# Altium PCB 24.067.PcbDoc
Units mil, origin at the board's own origin, x right, y up, seen from the top; angles counter-clockwise.
Board outline 1456.69 x 866.14 mil, 2 copper layers (Top Layer, Bottom Layer); 3 components, 16 nets, 33 pads, 0 vias.
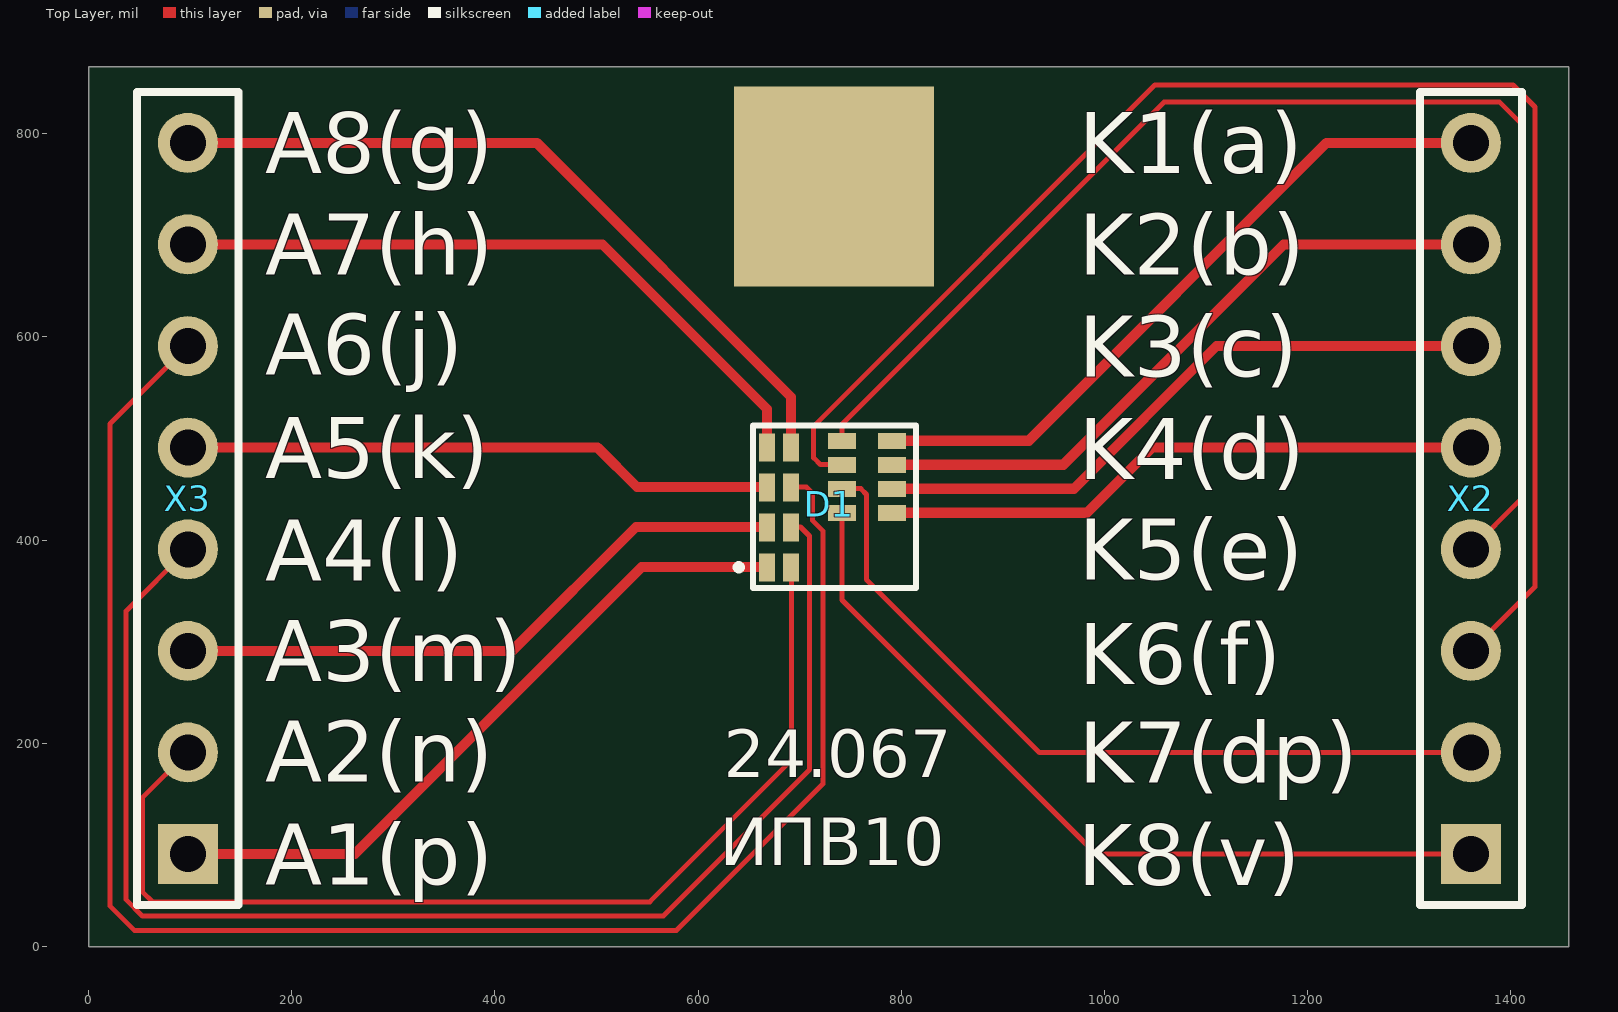
[diagram p0: Top Layer view]
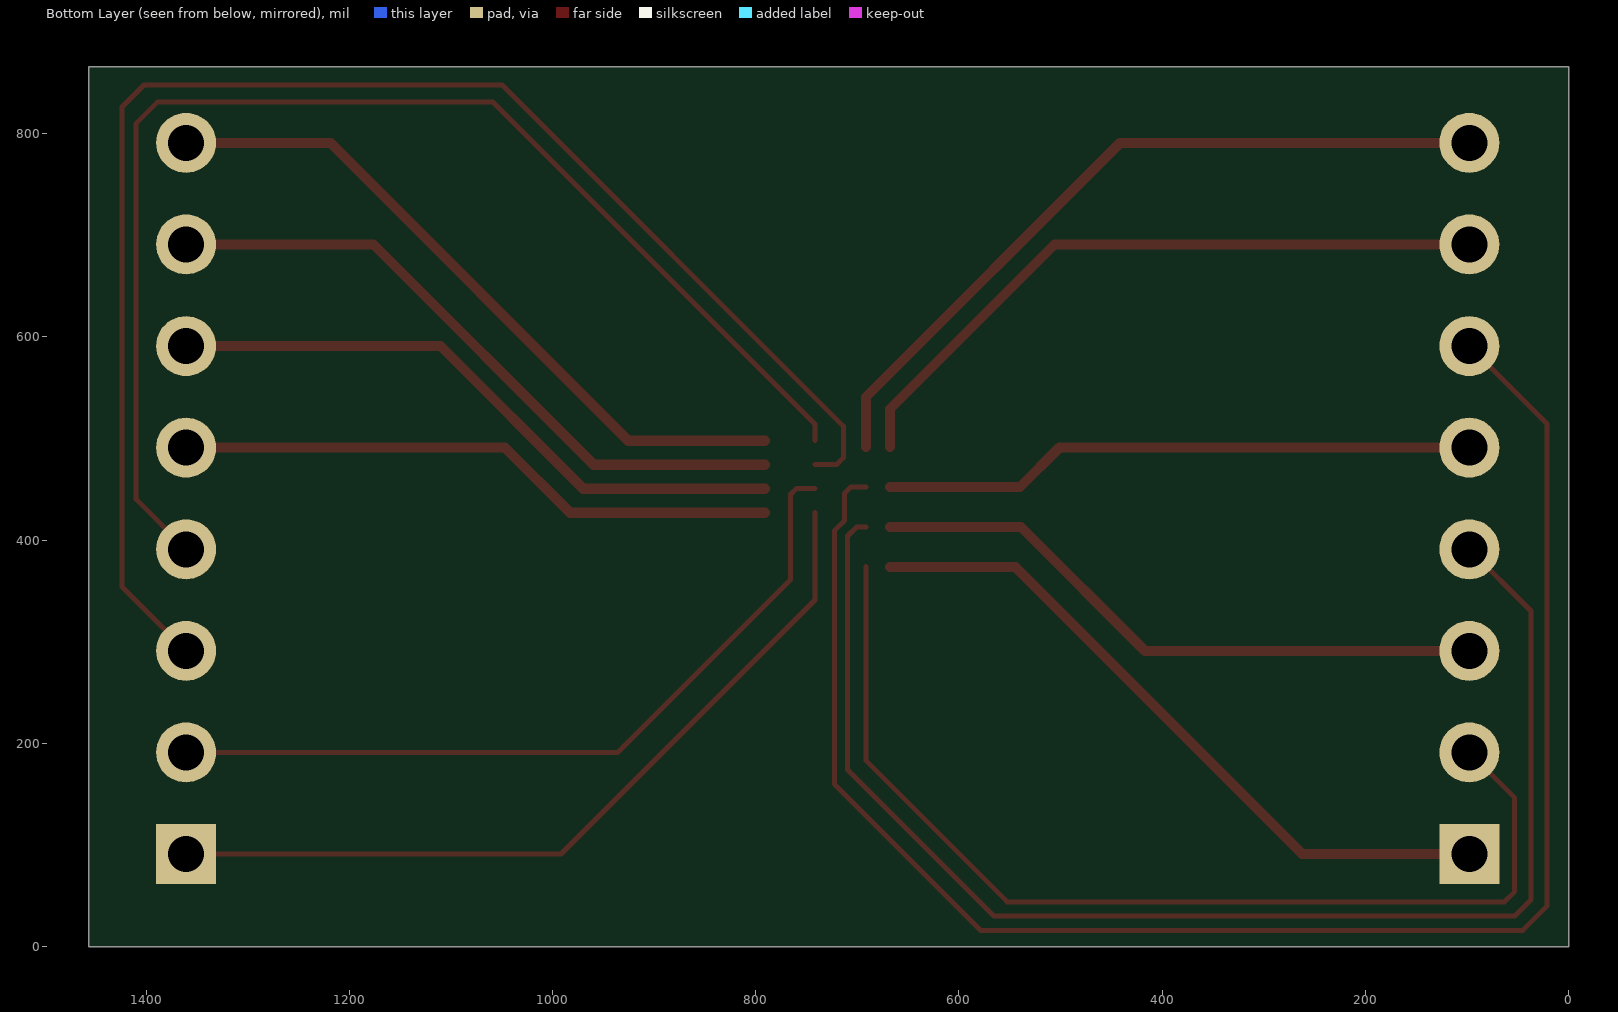
[diagram p1: Bottom Layer view, seen from below]

## Layer stack, top to bottom
Top Solder: solder mask 0.4, Solder Resist, Dk 3.5
Top Layer: signal copper 1.4
Dielectric 1: dielectric 12.6, FR-4, Dk 4.8
Bottom Layer: signal copper 1.4
Bottom Solder: solder mask 0.4, Solder Resist, Dk 3.5

## Board outline
1456.69,0 1456.69,866.14 0,866.14 0,0

## Design rules (kind name [scope] priority, off if disabled: settings)
Clearance [All] p1: gap=10 ignorepadtopadclearanceinfootprint=FALSE except(0: Arc-Hole Track-Hole SMDPad-Hole THPad-Hole Via-Hole Fill-Hole Poly-Hole Region-Hole Text-Hole; 7.87: Arc-Arc Arc-Track Arc-SMDPad Arc-THPad Track-Track Track-SMDPad Track-THPad SMDPad-SMDPad SMDPad-THPad THPad-THPad)
PolygonConnect [All] p1: connectstyle=Relief reliefconductorwidth=10 reliefentries=4 polygonreliefangle="90 Angle" airgapwidth=10
RoutingVias [All] p1: holewidth=28 width=50 viastyle="Through Hole" minholewidth=28 minwidth=50 maxholewidth=28 maxwidth=50
SolderMaskExpansion [All] p1: expansion=4 istentingtop=FALSE
Width [All] p1: maxlimit=10 minlimit=4.92 preferedwidth=10
30 further rules are at their usual default settings.

## Components (designator, comment, footprint, x,y, rotation, side; value= is the part's Value field where it differs from the comment)
D1 "LED_8x8" LED_8x8 667.59,373.26 r0 top
X2 "Header 8" HDR1X8 1360.69,91 r90 top
X3 "Header 8" HDR1X8 97.69,91 r90 top

## Footprints (in the part's own frame and the unit in brackets; to place one, negate y for a bottom-side part, rotate by r counter-clockwise, add the part's x,y. Pads: shape width x height; smd on the part's side, far side on the other; paste and mask are expansions set on the pad)
HDR1X8 [mm] "Connector; Header; 8 Position"
  rect 1.5x1.5 hole 0.9: 1(0,0)
  round 1.5 hole 0.9: 2(2.54,0) 3(5.08,0) 4(7.62,0) 5(10.16,0) 6(12.7,0) 7(15.24,0) 8(17.78,0)
  silkscreen extent -1.27,-1.27 19.05,1.27
LED_8x8 [mm] "24.067"
  rect 0.4x0.7 smd: 1(0,0) 2(0.6,0) 3(0,1) 4(0.6,1) 5(0,2) 6(0.6,2) 7(0,3) 8(0.6,3)
  rect 0.7x0.4 smd: 9(3.125,3.159) 10(3.125,2.559) 11(3.125,1.959) 12(3.125,1.359) 13(1.875,3.159) 14(1.875,2.559) 15(1.875,1.959) 16(1.875,1.359)
  silkscreen extent -0.72,-0.52 3.72,3.55

## Part data
X2 X3: "Header, 8-Pin", LatestRevisionDate=17-Jul-2002, LatestRevisionNote="Re-released for DXP Platform.", Publisher="Altium Limited"

## Free pads (board coordinates)
  rect 196.85x196.85 smd: 0(733.78,748.26)

## Nets (pads, with @x,y where several pads share a name; then routed paths per layer and width w, separated by ;. In a path a pad name is that pad's centre, name@x,y a point inside that pad or via, vN(x,y) a via of type N, cw(c..) or ccw(c..) an arc to the next point about the centre after c; other vN are vias at no path point)
A1: D1.1 X3.1 | length 687.2
  Top Layer w10: X3.1 262,91 544.5,373.5 D1.1@667.87,373.5
A2: D1.2 X3.2 | length 1046.8
  Top Layer w4.92: X3.2 53,146.31 53,54.04 63.04,44 552.5,44 691.69,183.19 D1.2@691.69,374
A3: D1.3 X3.3 | length 620.7
  Top Layer w10: X3.3 417,291 538.87,412.87 D1.3@667.87,412.87
A4: D1.4 X3.4 | length 1360.8
  Top Layer w4.92: X3.4 37,330.31 37,46.04 53.04,30 565.69,30 709.7,174.01 709.7,403.99 700.69,413 D1.4@691.69,413
A5: D1.5 X3.5 | length 586.2
  Top Layer w10: X3.5 501.13,491 539.89,452.24 D1.5@667.87,452.24
A6: D1.6 X3.6 | length 1667.9
  Top Layer w4.92: X3.6 21,514.31 21,40.04 45.04,16 578.69,16 722.69,160 722.69,409.09 712.69,419.09 712.69,446 706.46,452.24 D1.6@691.5,452.24
A7: D1.7 X3.7 | length 674.7
  Top Layer w10: X3.7 505.85,691 667.87,528.98 D1.7@667.87,491.61
A8: D1.8 X3.8 | length 746.6
  Top Layer w10: X3.8 441.28,791 691.5,540.79 D1.8@691.5,491.61
K1: D1.9 X2.8 | length 699.9
  Top Layer w10: D1.9@790.91,497.87 925.39,497.87 1218.52,791 X2.8 X2.8@1369.37,791
K2: D1.10 X2.7 | length 659.6
  Top Layer w10: D1.10@790.91,474.24 959.53,474.24 1176.28,691 X2.7
K3: D1.11 X2.6 | length 627.9
  Top Layer w10: D1.11@790.91,450.62 969.91,450.62 1110.28,591 X2.6
K4: D1.12 X2.5 | length 596.3
  Top Layer w10: D1.12@790.91,427 982.69,427 1046.69,491 X2.5
K5: D1.13 X2.4 | length 1263.8
  Top Layer w4.92: D1.13@741.69,497.87 741.69,514.17 1058.52,831 1389,831 1409.78,810.22 1409.78,440.09 X2.4
K6: D1.14 X2.3 | length 1481.6
  Top Layer w4.92: D1.14@741.69,474.24 720.45,474.24 713.69,481 713.69,512.17 1049.52,848 1402.04,848 1423.78,826.26 1423.78,354.09 X2.3
K7: D1.15 X2.2 | length 775.7
  Top Layer w4.92: D1.15@741.69,450.62 760.07,450.62 765.8,444.89 765.8,361 935.8,191 X2.2
K8: D1.16 X2.1 | length 808.6
  Top Layer w4.92: D1.16@741.69,427 741.69,341 991.69,91 X2.1

## Silkscreen, mask and mechanical layers (free items; w line width, h text height)
Top Overlay:
  text "A8(g)" at 174.02,761 h60
  text "K1(a)" at 974.54,761 h60
  text "A7(h)" at 174.02,661 h60
  text "K2(b)" at 974.54,661 h60
  text "A6(j)" at 174.02,563 h60
  text "K3(c)" at 974.54,561 h60
  text "A5(k)" at 174.02,461 h60
  text "K4(d)" at 974.54,460 h60
  text "K5(e)" at 974.54,361 h60
  text "A4(l)" at 174.02,360 h60
  text "A3(m)" at 174.02,261 h60
  text "K6(f)" at 974.54,258 h60
  text "A2(n)" at 174.02,162 h60
  text "K7(dp)" at 974.54,161 h60
  text "24.067" at 624.98,151.24 h80
  text "ИПВ10" at 621.05,64.63 h80
  text "A1(p)" at 174.02,61 h60
  text "K8(v)" at 973.78,60.26 h60
Mechanical 1:
  the board outline again, w10